# Altium PCB Controller PCB.PcbDoc (part 2 of 2)
Units mm, origin at the board's own origin, x right, y up, seen from the top; angles counter-clockwise.
Board outline 152.4 x 101.6 mm, 4 copper layers (Top Layer, Power, Ground, Bottom Layer), stack 0.903 mm thick; 79 components, 88 nets, 350 pads, 72 vias.
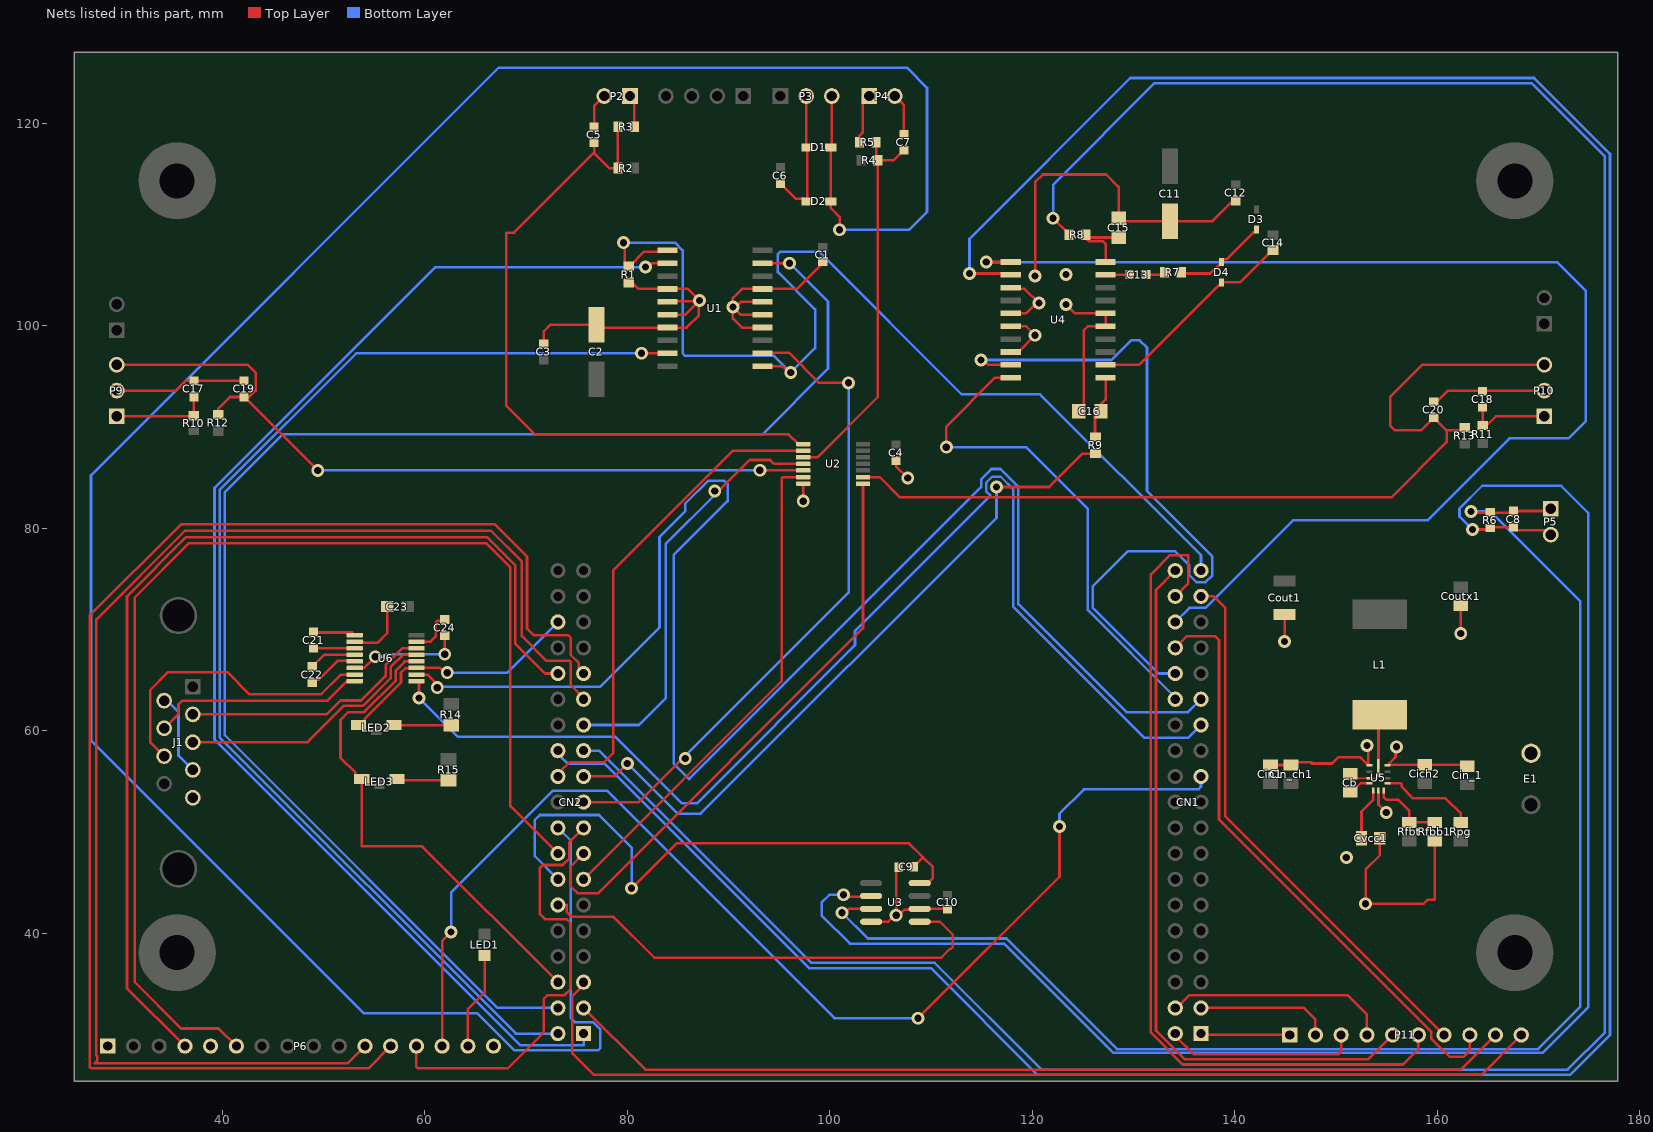
[diagram p4: the nets of this part, all layers, seen from the top]

## Via types
v1: diameter 1.27, hole 0.711, Top Layer to Bottom Layer, 71 vias
v2: diameter 1.27/1.27 (per signal layer), hole 0.711, Top Layer to Bottom Layer, 1 vias

## Nets (pads, with @x,y where several pads share a name; then routed paths per layer and width w, separated by ;. In a path a pad name is that pad's centre, name@x,y a point inside that pad or via, vN(x,y) a via of type N, cw(c..) or ccw(c..) an arc to the next point about the centre after c; other vN are vias at no path point) (continued)
GND: C1.1 C2.2 C3.1 C4.1 C5.1 C6.1 C7.1 C9.1 C10.1 C11.2 C12.1 C15.1 C16.1 C17.1 C18.1 C19.1 C20.1 Cich2.2 Cin1.2 Cin_1.2 Cin_ch1.2 Cout1.2 Coutx1.2 Cvcc1.2 D1.2 D2.2 E1.A2 J1.5 P2.2 P3.2 P4.2 P6.1 P6.5 P6.16 P9.2 P10.2 R1.1 Rfbb1.2 U1.4 U1.5 U1.6 U1.7 U1.14 U1.15 U1.16 U1.17 U2.7 U3.2 U3.8 U4.3 U4.5 U4.6 U4.8 U4.15 U4.16 U5.1 U5.6 U5.11 | length 233
  Top Layer w0.254: P9.2@29.591,93.599 35.433,93.599 36.398,94.564 C17.1@37.211,94.564 41.864,94.564 C19.1@42.164,94.264 ; C3.1@71.755,97.917 71.755,99.441 72.423,100.109 C2.2@76.962,100.109 77.249,99.822 U1.7@83.972,99.822 85.865,99.822 87.071,101.028 v1@87.071,102.425 ; C5.1@76.435,119.947 C5.1@76.733,119.649 76.733,121.691 P2.2@77.724,122.682 ; R1.1@80.137,104.521 80.212,104.521 81.101,103.632 U1.4@83.972,103.632 85.992,103.632 v1(87.135,102.489) v1@87.071,102.425 ; U1.6@83.972,101.092 85.738,101.092 v1@87.071,102.425 ; U1.5@83.972,102.362 84.036,102.425 v1@87.071,102.425 ; U1.15@93.345,101.092 91.199,101.092 v1(90.437,101.854) ; U1.16@93.345,102.362 91.22,102.362 90.712,101.854 v1(90.437,101.854) ; U1.14@93.472,99.949 U1.14@93.345,99.822 91.326,99.822 90.437,100.711 v1(90.437,101.854) ; C6.1@95.123,114.031 95.148,114.031 96.657,112.522 97.504,112.522 D2.2@97.758,112.268 D1.2@97.758,117.602 97.663,117.697 P3.2@97.663,122.682 P3.2@97.663,123.19 ; v1(97.38,82.677) U2.7@97.38,84.41 ; C1.1@99.06,105.903 99.035,105.903 96.764,103.632 U1.17@93.345,103.632 91.326,103.632 90.437,102.743 v1(90.437,101.854) ; C1.1@99.172,106.015 C1.1@99.299,106.142 ; U3.8@104.077,41.149 105.75,41.149 106.384,41.783 v1(106.553,41.783) ; P4.2@106.426,122.682 107.315,121.793 C7.1@107.315,118.918 ; P4.2@106.426,123.19 P4.2@106.484,123.132 ; C4.1@106.553,86.965 C4.1@106.553,86.665 106.553,86.106 v1(107.696,84.963) ; C9.1@106.773,46.355 106.553,46.135 v1(106.553,41.783) ; C9.1@106.773,46.534 C9.1@106.773,46.584 ; C10.1@111.633,42.389 111.603,42.419 U3.2@108.877,42.419 108.811,42.353 107.398,42.353 106.828,41.783 v1(106.553,41.783) ; U4.8@117.869,97.409 118.618,97.409 v1(120.269,99.06) 119.38,99.949 U4.6@117.869,99.949 ; U4.5@117.869,101.219 119.38,101.219 120.396,102.235 v1(120.65,102.235) 119.24,103.645 117.983,103.645 U4.3@117.869,103.759 ; v1(120.269,104.902) 120.269,114.173 121.031,114.935 127.299,114.935 128.524,113.71 C15.1@128.524,110.612 128.524,110.312 133.586,110.312 C11.2@133.604,110.33 137.767,110.33 140.056,112.619 C12.1@140.081,112.619 ; v1(123.317,102.108) 124.206,101.219 U4.16@127.241,101.219 U4.15@127.241,99.949 125.476,99.949 125.095,99.568 125.095,92.075 C16.1@124.587,91.567 ; Cin1.2@143.51,56.627 145.539,56.627 Cin_ch1.2@145.542,56.624 145.818,56.9 147.574,56.9 147.574,56.8 147.597,56.777 149.585,56.777 150.212,57.404 152.356,57.404 U5.1@153.035,56.725 ; v1(144.907,68.834) Cout1.2@144.907,71.502 ; v1(153.035,58.547) 153.157,58.425 153.157,56.626 153.158,56.624 U5.1@153.278,56.624 ; U5.6@154.178,54.048 154.178,52.705 v1(154.94,51.943) ; Cvcc1.2@154.305,49.403 154.305,47.71 152.908,46.313 v1(152.908,42.926) 158.623,42.926 159.004,43.307 159.751,43.307 Rfbb1.2@159.751,49.149 Rfbb1.2@159.37,48.768 ; U5.11@155.078,56.624 155.249,56.624 U5.11@155.251,56.626 ; v1(155.956,58.42) 155.858,58.322 155.858,57.404 155.251,56.797 U5.11@155.251,56.626 ; C20.1@159.639,92.202 159.664,92.202 161.061,93.599 P10.2@170.21,93.599 ; v1(162.306,69.596) Coutx1.2@162.306,72.377 ; Cin_1.2@162.941,56.515 162.814,56.642 Cich2.2@158.75,56.642 155.267,56.642 U5.11@155.251,56.626
  other v1: 123.317,105.048
  other v2: 151.003,47.498
NetC5_2: C5.2 R2.2 R3.2 U2.1 | length 68.2
  Top Layer w0.254: C5.2@76.733,118.349 76.733,117.072 76.708,117.047 ; R3.2@79.081,119.634 R2.2@79.081,115.57 78.21,115.57 76.733,117.047 76.708,117.047 ; U2.1@97.38,88.31 96.905,88.31 95.934,89.281 70.888,89.281 68.072,92.097 68.072,109.19 68.826,109.19 76.683,117.047 76.708,117.047
NetC7_2: C7.2 R4.2 R5.2 U2.3 | length 38
  Top Layer w0.254: U2.3@97.38,87.01 98.774,87.01 104.734,92.97 R4.2@104.734,116.332 ; R5.2@104.567,118.11 104.567,116.499 R4.2@104.734,116.332 ; C7.2@107.315,117.318 107.29,117.318 106.304,116.332 R4.2@104.734,116.332
NetC8_1: C8.1 P5.2 R6.1 U3.6 | length 164.1
  Top Layer w0.254: v1(101.346,43.815) 101.474,43.815 101.664,43.625 104.013,43.625 U3.6@104.077,43.689 ; v1(163.449,79.883) 165.08,79.883 R6.1@165.227,80.03 165.304,80.107 C8.1@167.513,80.107 167.811,79.809 170.411,79.809 170.845,79.375 P5.2@171.196,79.375
  Bottom Layer w0.254: v1(101.346,43.815) 99.949,43.815 99.187,43.053 99.187,41.783 101.981,38.989 117.221,38.989 128.016,28.194 170.375,28.194 174.879,32.698 174.879,81.534 172.212,84.201 164.425,84.201 162.179,81.955 162.179,81.153 v1(163.449,79.883)
NetC8_2: C8.2 P5.1 R6.2 U3.7 | length 145.8
  Top Layer w0.254: v1(101.219,42.037) 101.494,42.037 101.876,42.419 U3.7@104.077,42.419 ; v1(163.322,81.661) 163.43,81.553 167.367,81.553 167.521,81.707 170.988,81.707 P5.1@171.196,81.915
  Bottom Layer w0.254: v1(101.219,42.037) 103.759,39.497 117.431,39.497 128.35,28.578 169.929,28.578 174.117,32.766 174.117,72.771 165.227,81.661 v1(163.322,81.661)
NetC9_2: C9.2 CN2.14 U3.4 | length 59
  Top Layer w0.254: v1(80.431,44.45) 84.876,48.895 107.823,48.895 109.003,47.715 ; U3.4@108.296,45.119 108.456,44.959 U3.4@108.877,44.959 109.677,44.959 110.184,45.466 110.184,46.534 109.22,47.498 ; C9.2@108.323,46.579 108.323,46.629 109.192,47.498 109.22,47.498 ; 109.003,47.71 109.003,47.715 ; 109.003,47.715 109.22,47.498
  Bottom Layer w0.254: CN2.14@73.152,45.339 70.866,47.625 70.866,51.181 71.374,51.689 77.216,51.689 80.431,48.474 v1(80.431,44.45)
NetC13_1: C13.1 U4.19 | length 2.8
  Top Layer w0.254: U4.19@127.299,105.087 U4.19@127.241,105.029 129.902,105.029 C13.1@129.921,105.048
NetC13_2: C13.2 R7.1 | length 2.2
  Top Layer w0.254: C13.2@131.475,104.794 C13.2@131.221,105.048 132.861,105.048 R7.1@132.969,105.156
NetC14_1: C14.1 D4.1 U4.12 | length 21.3
  Top Layer w0.254: U4.12@127.241,96.139 130.54,96.139 138.411,104.01 138.561,104.01 138.684,104.133 D4.1@138.684,104.283 140.518,104.283 143.714,107.479 C14.1@143.764,107.479
NetC15_2: C15.2 R8.2 U4.20 | length 7.5
  Top Layer w0.254: R8.2@125.129,108.73 R8.2@125.147,108.712 ; U4.20@127.241,106.299 127.241,108.09 127,108.331 125.603,108.331 125.366,108.568 125.291,108.568 R8.2@125.147,108.712 ; C15.2@128.524,108.712 R8.2@125.147,108.712
NetC16_2: C16.2 R9.2 U4.11 | length 6.3
  Top Layer w0.254: R9.2@126.238,89.027 126.187,89.078 126.187,91.567 126.187,91.642 127.241,92.696 U4.11@127.241,94.869
NetC17_2: C17.2 P9.1 R10.1 | length 9.5
  Top Layer w0.254: P9.1@29.591,91.059 37.158,91.059 R10.1@37.211,91.112 C17.2@37.211,92.964
NetC18_2: C18.2 P10.1 R11.1 | length 8.4
  Top Layer w0.254: C18.2@164.465,91.664 164.465,89.842 164.54,89.842 165.757,91.059 P10.1@170.561,91.059
NetC19_2: C19.2 P9.3 R12.2 U2.5 | length 79.3
  Top Layer w0.254: P9.3@29.591,96.139 42.545,96.139 43.307,95.377 43.307,93.599 42.672,92.964 C19.2@42.189,92.964 ; R12.2@39.624,90.932 R12.2@39.624,91.232 39.624,91.821 40.767,92.964 C19.2@42.164,92.964 C19.2@42.189,92.964 ; v1(49.443,85.71) C19.2@42.189,92.964 ; v1(93.091,85.725) 93.099,85.717 97.373,85.717 U2.5@97.38,85.71
  Bottom Layer w0.254: v1(49.443,85.71) 49.45,85.717 93.083,85.717 v1(93.091,85.725)
NetC20_2: C20.2 P10.3 R13.2 U2.9 | length 89.8
  Top Layer w0.254: U2.9@103.28,85.06 104.932,85.06 106.934,83.058 155.453,83.058 160.904,88.509 160.904,89.662 ; R13.2@162.687,89.662 160.904,89.662 ; P10.3@170.561,96.139 158.496,96.139 155.321,92.964 155.321,90.17 155.829,89.662 158.374,89.662 159.614,90.902 C20.2@159.639,90.902 159.664,90.902 160.904,89.662
NetC21_1: C21.1 U6.3 | length 4.1
  Top Layer w0.254: C21.1@49.022,68.158 U6.3@53.084,68.158
NetC21_2: C21.2 U6.1 | length 4.2
  Top Layer w0.254: C21.2@49.022,69.712 52.83,69.712 U6.1@53.084,69.458
NetC22_1: C22.1 U6.5 | length 5.1
  Top Layer w0.254: C22.1@48.895,64.755 49.193,65.053 49.559,65.053 51.435,66.929 52.183,66.929 52.21,66.902 53.04,66.902 U6.5@53.084,66.858
NetC22_2: C22.2 U6.4 | length 4.7
  Top Layer w0.254: C22.2@48.895,66.33 50.073,67.508 U6.4@53.084,67.508
NetC23_2: C23.2 U6.2 | length 6.3
  Top Layer w0.254: U6.2@53.084,68.808 53.128,68.764 53.992,68.764 54.049,68.707 55.372,68.707 56.3,69.635 C23.2@56.3,72.263
NetC24_1: C24.1 U6.15 | length 4.5
  Top Layer w0.254: U6.15@59.184,68.808 60.579,68.808 61.087,69.316 61.087,70.717 61.236,70.866 61.849,70.866 C24.1@61.976,70.993
NetC24_2: C24.2 U6.6 | length 11.6
  Top Layer w0.254: U6.6@53.084,66.208 54.016,66.208 v1(55.118,67.31) ; v1(61.976,67.564) C24.2@61.976,69.693
  Bottom Layer w0.254: v1(55.118,67.31) 55.901,67.31 56.155,67.564 v1(61.976,67.564)
NetCboot1_1: Cb.1 U5.4 | length 2.1
  Top Layer w0.25: 152.411,54.824 U5.4@153.017,54.824
  Top Layer w0.254: Cb.1@151.467,54.045 Cb.1@151.384,53.962 151.549,53.962 152.411,54.824
NetCboot1_2: Cb.2 L1.1 U5.3 U5.12 | length 9.2
  Top Layer w0.135: Cb.2@151.816,55.334 152.508,55.334 152.51,55.332 U5.3@153.099,55.332 ; U5.3@153.278,55.324 154.029,55.324 154.178,55.473 U5.12@154.178,56.287
  Top Layer w0.254: Cb.2@151.384,55.766 Cb.2@151.816,55.334 ; U5.3@153.107,55.324 U5.3@153.278,55.324 ; U5.12@154.178,56.287 154.178,61.468 L1.1@154.305,61.595
NetCin1_1: 
NetCN1_1: CN1.1 P11.1 | length 8.8
  Top Layer w0.254: CN1.1@136.652,30.099 136.779,29.972 P11.1@145.415,29.972
NetCN1_2: CN1.2 P11.3 | length 19.1
  Top Layer w0.254: CN1.2@134.112,30.099 134.112,29.881 135.926,28.067 150.241,28.067 150.495,28.321 P11.3@150.495,29.972
NetCN1_3: CN1.3 P11.2 | length 13.3
  Top Layer w0.254: CN1.3@136.652,32.639 146.812,32.639 147.955,31.496 P11.2@147.955,29.972
NetCN1_4: CN1.4 P11.4 | length 22.3
  Top Layer w0.254: CN1.4@134.112,32.639 134.239,32.639 135.509,33.909 151.13,33.909 153.035,32.004 P11.4@153.035,29.972
NetCN1_21: CN1.21 P6.14 | length 117.2
  Top Layer w0.254: P6.14@61.722,28.864 61.722,39.243 v1(62.611,40.132) ; v1(108.712,31.623) 122.682,45.593 v1(122.682,50.546)
  Bottom Layer w0.254: v1(62.611,40.132) 62.611,44.017 72.684,54.09 77.99,54.09 100.457,31.623 v1(108.712,31.623) ; v1(122.682,50.546) 122.682,51.816 125.095,54.229 136.398,54.229 136.652,54.483 CN1.21@136.652,55.499
NetCN1_25: CN1.25 U6.9 | length 116.9
  Top Layer w0.254: U6.9@59.184,64.908 59.338,64.908 59.436,64.81 v1(59.436,63.246)
  Bottom Layer w0.254: v1(59.436,63.246) 63.246,59.436 78.78,59.436 85.384,52.832 86.868,52.832 102.489,68.453 102.489,69.872 115.857,83.239 115.443,83.653 115.443,84.495 116.038,85.09 116.88,85.09 118.11,83.86 118.11,72.285 131.086,59.309 135.382,59.309 CN1.25@136.652,60.579
NetCN1_27: CN1.27 U6.10 | length 158.6
  Top Layer w0.254: U6.10@59.184,65.558 60.297,65.558 61.236,64.619 v1(61.236,64.262)
  Bottom Layer w0.254: v1(61.236,64.262) 61.333,64.359 77.343,64.359 83.185,70.201 83.185,79.121 85.725,81.661 85.725,82.423 88.011,84.709 89.564,84.709 89.916,84.357 89.916,82.677 84.582,77.343 84.582,56.769 86.106,55.245 114.935,84.074 114.935,84.836 115.951,85.852 116.836,85.852 118.618,84.07 118.618,72.517 129.286,61.849 135.382,61.849 CN1.27@136.652,63.119
NetCN1_28: CN1.28 U4.10 | length 49.3
  Top Layer w0.254: v1(111.506,88.011) 111.506,90.043 116.332,94.869 U4.10@117.869,94.869
  Bottom Layer w0.254: v1(111.506,88.011) 119.38,88.011 125.476,81.915 125.476,71.926 134.112,63.29 CN1.28@134.112,63.119
NetCN1_30: CN1.30 U4.9 | length 74.1
  Top Layer w0.254: v1(114.935,96.617) 115.21,96.617 115.688,96.139 U4.9@117.869,96.139
  Bottom Layer w0.254: v1(114.935,96.617) 127.819,96.617 129.754,98.552 130.596,98.552 131.318,97.83 131.318,83.693 137.783,77.228 137.783,75.351 137.12,74.688 136.184,74.688 135.509,75.363 135.509,76.327 134.112,77.724 129.413,77.724 125.984,74.295 125.984,72.136 132.461,65.659 CN1.30@134.112,65.659
NetCN1_32: CN1.32 P11.8 | length 59.3
  Top Layer w0.254: CN1.32@134.112,68.199 135.255,69.342 138.049,69.342 138.43,68.961 138.43,51.256 159.385,30.301 159.385,29.643 161.215,27.813 162.56,27.813 163.195,28.448 P11.8@163.195,29.972
NetCN1_34: CN1.34 U4.1 | length 124.4
  Top Layer w0.254: v1(115.443,106.283) 115.451,106.291 117.861,106.291 U4.1@117.869,106.299
  Bottom Layer w0.254: v1(115.443,106.283) 171.815,106.283 174.625,103.473 174.625,90.551 172.946,88.872 167.104,88.872 159.004,80.772 145.744,80.772 137.12,72.148 135.521,72.148 CN1.34@134.112,70.739
NetCN1_35: CN1.35 P11.7 | length 54
  Top Layer w0.254: CN1.35@136.652,73.279 137.922,73.279 139.065,72.136 139.065,51.562 P11.7@160.655,29.972
NetCN1_36: CN1.36 P11.6 | length 84.1
  Top Layer w0.254: CN1.36@134.112,73.279 135.382,74.549 135.382,77.343 133.604,77.343 131.699,75.438 131.699,30.194 134.842,27.051 156.591,27.051 158.115,28.575 P11.6@158.115,29.972
NetCN1_37: CN1.37 R1.2 U1.1 U1.11 | length 107.9
  Top Layer w0.254: v1(79.629,108.204) 79.739,108.094 79.739,106.194 80.062,105.871 R1.2@80.137,105.871 80.212,105.871 81.661,107.32 83.85,107.32 U1.1@83.972,107.442 ; U1.11@93.345,96.012 95.337,96.012 95.972,95.377 v1(96.139,95.377)
  Bottom Layer w0.254: v1(79.629,108.204) 84.709,108.204 85.471,107.442 85.471,97.282 85.725,97.028 94.488,97.028 v1(96.139,95.377) 98.552,97.79 98.552,101.6 94.869,105.283 94.869,107.061 95.123,107.315 98.933,107.315 113.03,93.218 120.777,93.218 136.652,77.343 CN1.37@136.652,75.819
NetCN1_38: CN1.38 P11.5 | length 71.7
  Top Layer w0.254: CN1.38@134.112,75.819 132.207,73.914 132.207,30.405 135.053,27.559 153.162,27.559 P11.5@155.575,29.972
NetCN2_1: CN2.1 U1.2 | length 128.8
  Top Layer w0.254: v1(81.788,105.791) 82.063,105.791 82.444,106.172 U1.2@83.972,106.172
  Bottom Layer w0.254: CN2.1@75.692,30.099 75.692,28.968 69.417,28.968 39.243,59.142 39.243,83.987 61.047,105.791 v1(81.788,105.791)
NetCN2_2: CN2.2 U1.9 | length 119.8
  Top Layer w0.254: v1(81.407,97.282) U1.9@83.972,97.282
  Bottom Layer w0.254: CN2.2@73.152,30.099 69.005,30.099 39.751,59.353 39.751,83.776 53.257,97.282 v1(81.407,97.282)
NetCN2_3: CN2.3 P11.9 | length 94
  Top Layer w0.254: CN2.3@75.692,32.639 81.788,26.543 162.306,26.543 P11.9@165.735,29.972
NetCN2_4: CN2.4 U1.19 | length 147.3
  Top Layer w0.254: U1.19@93.345,106.172 v1(96.025,106.172)
  Bottom Layer w0.254: CN2.4@73.152,32.639 67.183,32.639 40.259,59.563 40.259,83.566 45.974,89.281 93.345,89.281 99.822,95.758 99.822,102.375 v1(96.025,106.172)
NetCN2_5: CN2.5 P11.10 | length 103.7
  Top Layer w0.254: CN2.5@75.692,35.179 75.692,34.925 74.549,33.782 74.549,28.194 76.708,26.035 164.338,26.035 P11.10@168.275,29.972
NetCN2_6: CN2.6 LED3.1 U6.12 | length 48.9
  Top Layer w0.254: U6.12@59.184,66.858 58.054,66.858 57.15,65.954 57.15,64.98 54.019,61.849 52.451,61.849 51.689,61.087 51.689,57.333 53.154,55.868 53.154,55.618 53.527,55.245 LED3.1@53.777,55.245 53.777,48.585 59.746,48.585 CN2.6@73.152,35.179
NetCN2_12: CN2.12 U3.1 | length 47
  Top Layer w0.254: CN2.12@73.152,42.799 74.008,42.799 74.008,42.131 74.23,41.91 74.484,41.656 78.613,41.656 82.677,37.592 110.998,37.592 111.887,38.481 111.992,38.481 112.141,38.63 112.141,39.88 110.872,41.149 U3.1@108.877,41.149
NetCN2_13: CN2.13 U2.6 | length 49.9
  Top Layer w0.254: CN2.13@75.692,45.339 95.25,64.897 95.25,84.911 95.399,85.06 U2.6@97.38,85.06
NetCN2_15: CN2.15 U2.8 | length 58
  Top Layer w0.254: CN2.15@75.692,47.879 74.422,46.609 74.422,44.642 75.122,43.942 77.089,43.942 103.28,70.133 U2.8@103.28,84.41
NetCN2_16: CN2.16 P6.6 | length 121
  Top Layer w0.254: 31.369,35.814 31.369,35.179 35.941,30.607 39.659,30.607 P6.6@41.402,28.864 ; 31.369,35.941 31.369,73.152 36.747,78.53 66.04,78.53 68.453,76.117 68.453,52.578 CN2.16@73.152,47.879
NetCN2_17: CN2.17 P6.13 | length 43.9
  Top Layer w0.254: P6.13@59.182,28.864 59.182,26.819 59.331,26.67 68.199,26.67 71.755,30.226 71.755,33.528 72.136,33.909 73.803,33.909 74.422,34.528 74.422,40.999 74.019,41.402 71.882,41.402 71.374,41.91 71.374,46.46 71.662,46.748 73.62,46.748 74.283,47.411 74.283,49.01 CN2.17@75.692,50.419
NetCN2_18: CN2.18 D1.1 D2.1 P3.3 | length 249.5
  Top Layer w0.254: P3.3@100.203,123.19 P3.3@100.203,122.682 100.203,117.697 D1.1@100.108,117.602 D2.1@100.108,112.268 100.108,111.601 100.965,110.744 v1(100.965,109.474)
  Bottom Layer w0.254: CN2.18@73.152,50.419 74.422,49.149 74.422,31.645 74.837,31.23 76.6,31.23 77.343,30.487 77.343,28.702 77.089,28.448 68.845,28.448 65.162,32.131 53.975,32.131 27.051,59.055 27.051,85.217 67.31,125.476 107.613,125.476 109.601,123.488 109.601,111.252 107.823,109.474 v1(100.965,109.474)
NetCN2_19: CN2.19 U1.12 | length 65.4
  Top Layer w0.254: CN2.19@75.692,52.959 81.153,52.959 85.471,57.277 v1(85.725,57.277) ; U1.12@93.345,97.282 93.408,97.346 95.961,97.346 98.946,94.361 v1(101.854,94.361)
  Bottom Layer w0.254: v1(85.725,57.277) 85.725,57.531 101.854,73.66 v1(101.854,94.361)
NetCN2_21: CN2.21 R9.1 | length 69.3
  Top Layer w0.254: CN2.21@75.692,55.499 78.74,55.499 v1(80.01,56.769) ; v1(116.459,84.074) 121.666,84.074 124.968,87.376 R9.1@125.937,87.376
  Bottom Layer w0.254: v1(80.01,56.769) 84.963,51.816 87.249,51.816 116.459,81.026 v1(116.459,84.074)
NetCN2_22: CN2.22 U2.2 | length 48.3
  Top Layer w0.254: CN2.22@73.152,55.499 73.432,55.779 73.432,56.012 74.315,56.896 77.724,56.896 78.613,57.785 78.613,75.819 90.454,87.66 U2.2@97.38,87.66
NetCN2_23: CN2.23 R8.1 | length 269.1
  Top Layer w0.254: v1(122.047,110.617) 122.047,110.612 123.618,109.041 R8.1@123.618,108.966
  Bottom Layer w0.254: CN2.23@75.692,58.039 77.216,58.039 98.171,37.084 110.363,37.084 120.904,26.543 172.847,26.543 176.53,30.226 176.53,116.713 169.291,123.952 132.08,123.952 122.047,113.919 v1(122.047,110.617)
NetCN2_24: CN2.24 U4.2 | length 286.4
  Top Layer w0.254: v1(113.792,105.156) 117.742,105.156 U4.2@117.869,105.029
  Bottom Layer w0.254: CN2.24@73.152,58.039 73.152,57.702 74.085,56.769 77.768,56.769 97.961,36.576 109.982,36.576 120.523,26.035 173.101,26.035 177.038,29.972 177.038,116.967 169.545,124.46 129.667,124.46 113.792,108.585 v1(113.792,105.156)
NetCN2_25: CN2.25 U2.4 | length 41.8
  Top Layer w0.254: v1(88.646,83.693) 89.027,83.693 92.075,86.741 94.107,86.741 94.488,86.36 U2.4@97.38,86.36
  Bottom Layer w0.254: CN2.25@75.692,60.579 81.153,60.579 83.82,63.246 83.82,78.486 88.646,83.312 v1(88.646,83.693)
NetCN2_27: CN2.27 P6.11 | length 135.7
  Top Layer w0.254: P6.11@54.102,28.864 52.416,27.178 27.432,27.178 27.686,27.432 27.686,27.841 27.571,27.956 27.571,71.005 36.322,79.756 66.548,79.756 69.596,76.708 69.596,69.342 72.031,66.907 74.295,66.907 74.422,66.78 74.422,64.516 75.692,63.246 CN2.27@75.692,63.119
NetCN2_29: CN2.29 P6.12 | length 139.3
  Top Layer w0.254: P6.12@56.642,28.864 54.448,26.67 27.073,26.67 26.924,26.819 26.924,71.374 35.941,80.391 66.929,80.391 70.104,77.216 70.104,70.104 70.75,69.458 74.157,69.458 74.422,69.193 74.422,67.508 75.22,66.711 75.22,66.223 75.692,65.75 CN2.29@75.692,65.659
NetCN2_30: CN2.30 P6.4 | length 101.9
  Top Layer w0.254: P6.4@36.322,28.864 30.607,34.579 30.607,73.279 36.449,79.121 66.167,79.121 68.961,76.327 68.961,68.58 71.882,65.659 CN2.30@73.152,65.659
NetCN2_34: CN2.34 LED2.1 U6.11 | length 25
  Top Layer w0.254: LED2.1@53.467,60.579 53.717,60.579 54.09,60.952 54.09,61.202 57.658,64.77 57.658,65.744 58.078,66.164 U6.11@59.052,66.164 ; U6.11@59.14,66.252 U6.11@59.184,66.208 61.491,66.208 61.955,65.744 v1(62.23,65.744)
  Bottom Layer w0.254: v1(62.23,65.744) 68.157,65.744 CN2.34@73.152,70.739 CN2.34@73.152,70.675
NetCvcc1_1: Cvcc1.1 U5.5 | length 5.2
  Top Layer w0.254: Cvcc1.1@152.502,49.403 152.502,52.037 153.67,53.205 U5.5@153.67,54.091
NetD3_1: D3.1 D4.2 R7.2 | length 9.9
  Top Layer w0.254: R7.2@134.319,105.156 137.557,105.156 138.411,106.01 138.561,106.01 138.684,106.133 D4.2@138.684,106.283 138.684,106.433 138.807,106.556 139.179,106.556 141.84,109.217 141.99,109.217 142.113,109.34 D3.1@142.113,109.49 D3.1@142.049,109.427
NetJ1_2: J1.2 U6.14 | length 25.4
  Top Layer w0.254: J1.2@37.107,61.619 50.324,61.619 51.697,62.992 53.725,62.992 56.134,65.401 56.134,66.509 56.323,66.698 56.327,66.698 57.788,68.158 U6.14@59.184,68.158
NetJ1_3: J1.3 U6.13 | length 26.3
  Top Layer w0.254: J1.3@37.107,58.879 48.446,58.879 52.051,62.484 53.935,62.484 56.642,65.191 56.642,66.294 57.856,67.508 U6.13@59.184,67.508
NetJ1_4: J1.4 J1.6 | length 8.2
  Bottom Layer w0.254: J1.6@34.267,62.989 34.547,62.989 35.687,61.849 35.687,57.559 J1.4@37.107,56.139
NetJ1_7: J1.7 U6.8 | length 21.3
  Top Layer w0.254: J1.7@34.267,60.249 35.687,61.669 35.687,62.611 36.065,62.989 50.403,62.989 52.322,64.908 U6.8@53.084,64.908
NetJ1_8: J1.8 U6.7 | length 29.7
  Top Layer w0.254: J1.8@34.267,57.509 32.893,58.883 32.893,64.008 34.671,65.786 40.513,65.786 42.672,63.627 49.784,63.627 51.715,65.558 U6.7@53.084,65.558
NetLED1_1: LED1.1 P6.15 | length 9.7
  Top Layer w0.254: P6.15@64.297,28.899 P6.15@64.262,28.864 64.262,32.512 65.913,34.163 LED1.1@65.913,37.812
NetLED2_2: LED2.2 R14.2 | length 5.7
  Top Layer w0.254: LED2.2@56.967,60.579 56.985,60.561 R14.2@62.611,60.561
NetLED3_2: LED3.2 R15.2 | length 5.1
  Top Layer w0.254: LED3.2@57.277,55.245 57.404,55.118 R15.2@62.357,55.118
NetP2_1: P2.1 R3.1 | length 2.9
  Top Layer w0.254: R3.1@80.685,119.634 P2.1@80.685,122.555
NetP4_1: P4.1 R5.1 | length 4.8
  Top Layer w0.254: 102.917,118.745 103.238,119.066 103.238,122.542 P4.1@103.886,123.19
NetRfbb1_1: Rfbb1.1 Rfbt.2 U5.7 | length 7.4
  Top Layer w0.254: U5.7@154.678,54.099 154.678,53.928 154.686,53.92 154.686,53.467 154.94,53.213 156.083,53.213 157.226,52.07 Rfbt.2@157.226,50.94 157.239,50.952 Rfbb1.1@159.751,50.952
NetRpg1_2: Rpg.2 U5.8 | length 9.5
  Top Layer w0.254: U5.8@155.077,54.821 155.076,54.822 U5.8@155.078,54.824 ; U5.8@155.086,54.816 156.385,54.816 156.464,54.737 156.464,54.483 157.607,53.34 160.782,53.34 162.306,51.816 Rpg.2@162.306,50.94
pads on no net: CN1.5 CN1.7 CN1.8 CN1.9 CN1.10 CN1.11 CN1.12 CN1.13 CN1.14 CN1.15 CN1.17 CN1.18 CN1.19 CN1.20 CN1.22 CN1.23 CN1.24 CN1.26 CN1.29 CN1.31 CN1.33 CN2.7 CN2.8 CN2.9 CN2.10 CN2.11 CN2.20 CN2.26 CN2.28 CN2.31 CN2.32 CN2.33 CN2.35 CN2.36 CN2.37 CN2.38 J1.1 J1.9 J1.MH1 J1.MH2 LED2.3 LED3.3 P6.3 P6.7 P6.8 P6.9 P6.10 U2.10 U2.11 U2.12 U2.13 U3.5

## Polygon pours and split planes (outlines as drawn)
3V3 on Power (split plane): 68.832,76.273 68.832,51.181 68.841,51.131 68.869,51.089 69.123,50.835 69.165,50.807 69.215,50.798 138.174,50.798 138.174,48.514 138.174,43.307 138.183,43.257 138.211,43.215 138.244,43.182 42.164,43.182 42.114,43.173 42.072,43.145 41.31,42.383 41.282,42.341 41.273,42.291 41.282,42.241 41.293,42.226 41.282,42.211 41.273,42.162 41.273,25.91 25.91,25.91 25.91,81.913 63.192,81.913
5V on Power (split plane): 177.29,25.91 41.531,25.91 41.531,42.162 41.522,42.211 41.515,42.221 42.218,42.924 138.557,42.924 138.607,42.933 138.649,42.961 138.677,43.003 138.686,43.053 138.677,43.103 138.649,43.145 138.432,43.361 138.432,48.514 138.432,50.927 138.423,50.977 138.395,51.019 138.353,51.047 138.303,51.056 69.269,51.056 69.09,51.235 69.09,76.327 69.081,76.377 69.053,76.419 63.338,82.134 63.296,82.162 63.246,82.171 25.91,82.171 25.91,126.49 177.29,126.49
12V on Power (split plane): 151.128,117.548 151.128,81.588 150.911,81.372 150.883,81.33 150.874,81.28 150.874,60.071 150.883,60.021 150.911,59.979 150.953,59.951 151.003,59.942 151.053,59.951 151.068,59.962 151.083,59.951 151.132,59.942 168.654,59.942 168.654,55.626 168.663,55.576 168.691,55.534 168.769,55.457 168.811,55.429 168.86,55.419 173.176,55.419 173.176,50.167 139.448,50.167 139.448,59.942 139.573,59.942 139.623,59.951 139.665,59.979 139.693,60.021 139.702,60.071 139.702,84.201 139.693,84.251 139.665,84.293 139.538,84.42 139.496,84.448 139.446,84.457 118.291,84.457 110.582,92.167 110.54,92.195 110.49,92.204 67.439,92.204 67.439,109.853 114.173,109.853 114.223,109.862 114.265,109.89 126.038,121.664 147.012,121.664
GND on Ground (split plane): 177.29,25.91 25.91,25.91 25.91,126.49 177.29,126.49

## Other copper
Power (plane layer: these items are gaps in the copper):
  lines w0.254: 25.4,82.042 63.246,82.042 68.961,76.327 68.961,51.181 69.215,50.927 138.303,50.927 138.303,48.514 138.303,43.307 138.557,43.053 42.164,43.053 41.402,42.291 ; 41.402,25.4 41.402,42.162 ; 151.003,60.071 151.003,81.28 151.257,81.534 151.257,117.602 147.066,121.793 128.651,121.793 125.984,121.793 114.173,109.982 67.31,109.982 67.31,92.075 110.49,92.075 118.237,84.328 139.446,84.328 139.573,84.201 139.573,60.071 139.319,60.071 139.319,50.038 167.386,50.038 173.305,50.038 173.305,55.549 168.86,55.549 168.783,55.626 168.783,60.071 151.132,60.071 ; 177.546,50.165 177.8,50.419

## Silkscreen, mask and mechanical layers (free items; w line width, h text height)
Top Overlay:
  lines w0.254: 159.131,57.785 159.131,58.166 161.544,60.579 ; 163.068,57.658 163.068,59.695 164.465,61.092
  text "A-" at 85.598,124.714 h1.52
  text "B" at 88.646,124.714 h1.52
  text "B-" at 90.932,124.714 h1.52
  text "S" at 99.568,124.714 h1.52
  text "A" at 83.312,124.587 h1.52
  text "+" at 94.488,124.333 h1.52
  text "-" at 77.089,124.079 h1.52
  text "-" at 97.155,123.952 h1.52
  text "-" at 105.791,123.952 h1.52
  text "Jeff Scherer" at 27.559,123.063 h1.52
  text "6122857" at 27.94,120.396 h1.52
  text "D2" at 165.862,101.854 h1.52
  text "D2" at 31.623,101.473 h1.52
  text "D1" at 165.862,99.314 h1.52
  text "D1" at 31.75,98.552 h1.52
  text "-" at 26.416,92.964 h1.52
  text "-" at 172.72,92.583 h1.52
  text "+" at 172.72,90.216 h1.52
  text "+" at 26.416,89.962 h1.52
  text "H" at 173.228,81.153 h1.52
  text "L" at 173.355,78.74 h1.52
  text "I2_D" at 168.021,32.131 h1.52
  text "CLK" at 146.177,32.004 h1.52 r90
  text "MOSI" at 148.717,32.004 h1.52 r90
  text "MISO" at 151.257,32.004 h1.52 r90
  text "CSI" at 153.797,32.004 h1.52 r90
  text "ADC1" at 156.283,32.004 h1.52 r90
  text "ADC2" at 158.75,32.004 h1.52 r90
  text "ADC3" at 161.29,32.004 h1.52 r90
  text "OUT" at 163.83,32.004 h1.52 r90
  text "-" at 29.464,30.861 h1.52 r90
  text "+" at 32.004,30.861 h1.52 r90
  text "NC" at 34.544,30.861 h1.52 r90
  text "RS" at 36.957,30.861 h1.52 r90
  text "-" at 39.624,30.861 h1.52 r90
  text "E" at 42.164,30.861 h1.52 r90
  text "D0" at 44.577,30.861 h1.52 r90
  text "D1" at 47.117,30.861 h1.52 r90
  text "D2" at 49.657,30.861 h1.52 r90
  text "D3" at 52.324,30.861 h1.52 r90
  text "D4" at 54.864,30.861 h1.52 r90
  text "D5" at 57.277,30.861 h1.52 r90
  text "D6" at 59.944,30.861 h1.52 r90
  text "D7" at 62.484,30.861 h1.52 r90
  text "BL" at 65.151,30.861 h1.52 r90
  text "-" at 67.437,30.861 h1.52 r90
  text "I_CLK" at 165.481,26.543 h1.52

## Text inside footprints (layer, text, board x,y; h text height)
CN1: Top Overlay "2" at 134.62,27.273 h1.27 r90; Top Overlay "1" at 137.16,27.559 h1.27 r90; Top Overlay "37" at 137.287,77.597 h1.27 r90; Top Overlay "38" at 134.706,77.597 h1.27 r90
CN2: Top Overlay "38" at 73.66,77.724 h1.27 r90; Top Overlay "37" at 76.2,77.851 h1.27 r90; Top Overlay "1" at 76.2,27.559 h1.27 r90; Top Overlay "2" at 73.533,27.305 h1.27 r90
E1: Top Overlay "A1" at 167.386,47.879 h1.5
U1: Top Overlay "*" at 83.401,107.874 h1.27; Mechanical 13 "*" at 84.925,106.883 h1.27
U4: Top Overlay "*" at 117.297,106.731 h1.27; Mechanical 13 "*" at 118.821,105.74 h1.27